# Altium PCB HTY-21024C V01.PcbDoc
Units mm, origin at the board's own origin, x right, y up, seen from the top; angles counter-clockwise.
Board outline 17 x 10 mm, 2 copper layers (Top Layer, Bottom Layer); 4 components, 3 nets, 12 pads, 0 vias.
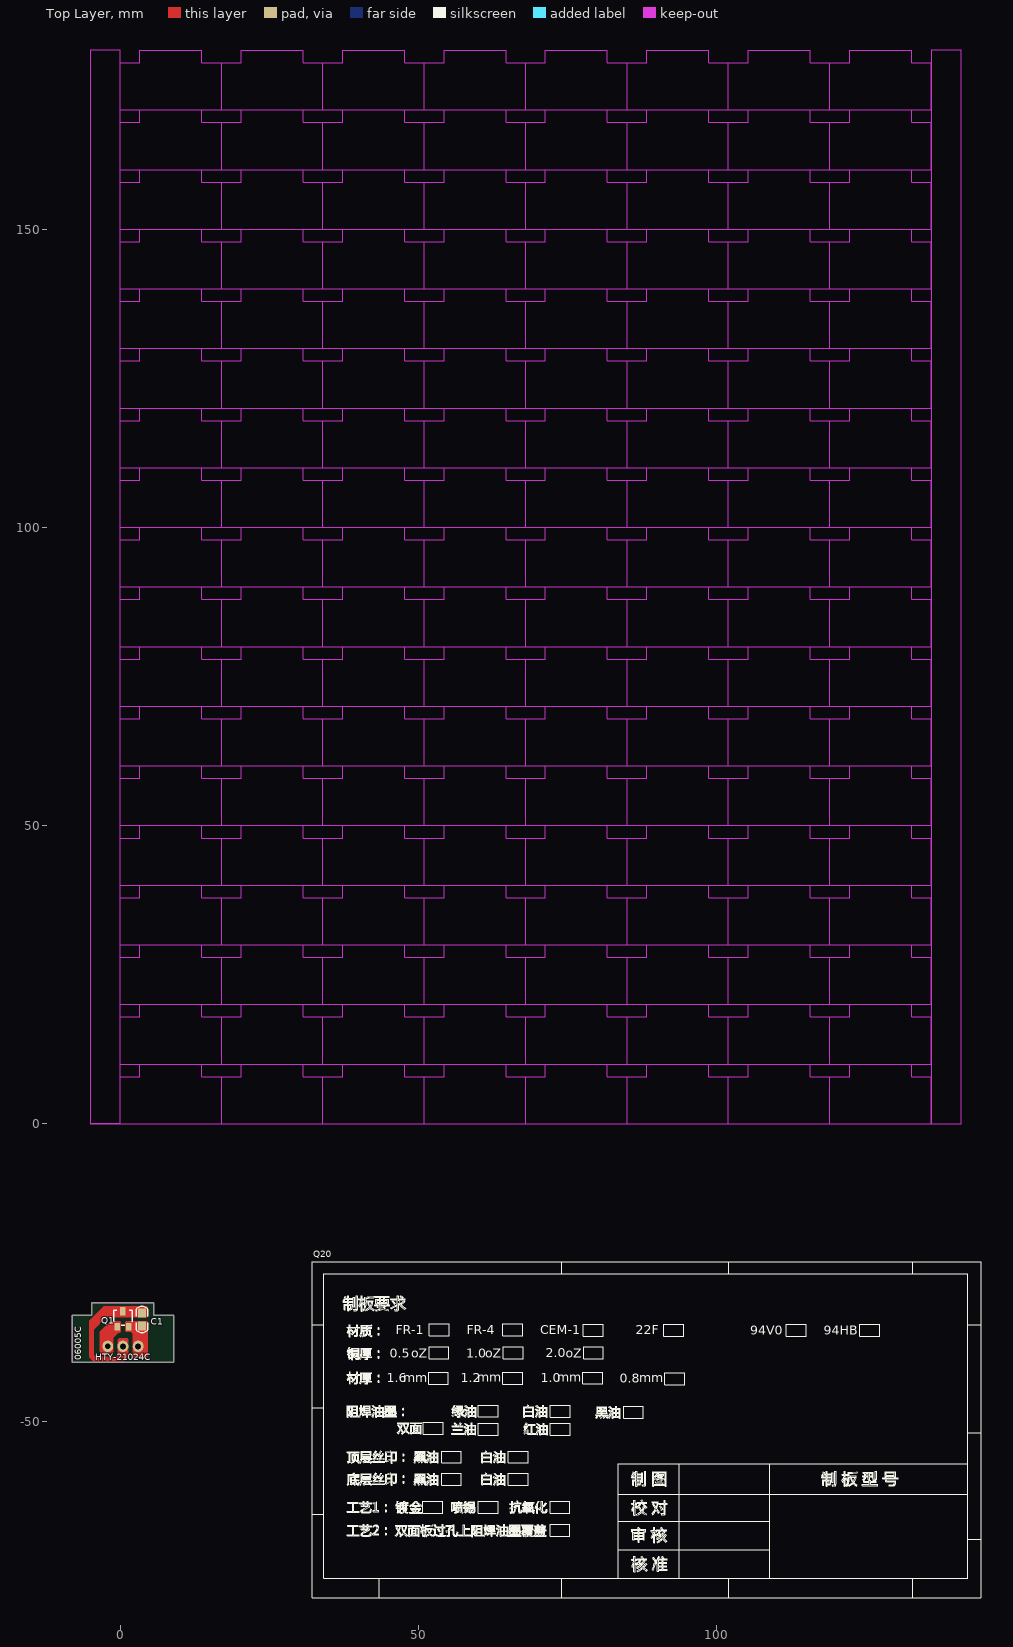
[diagram p0: Top Layer view]
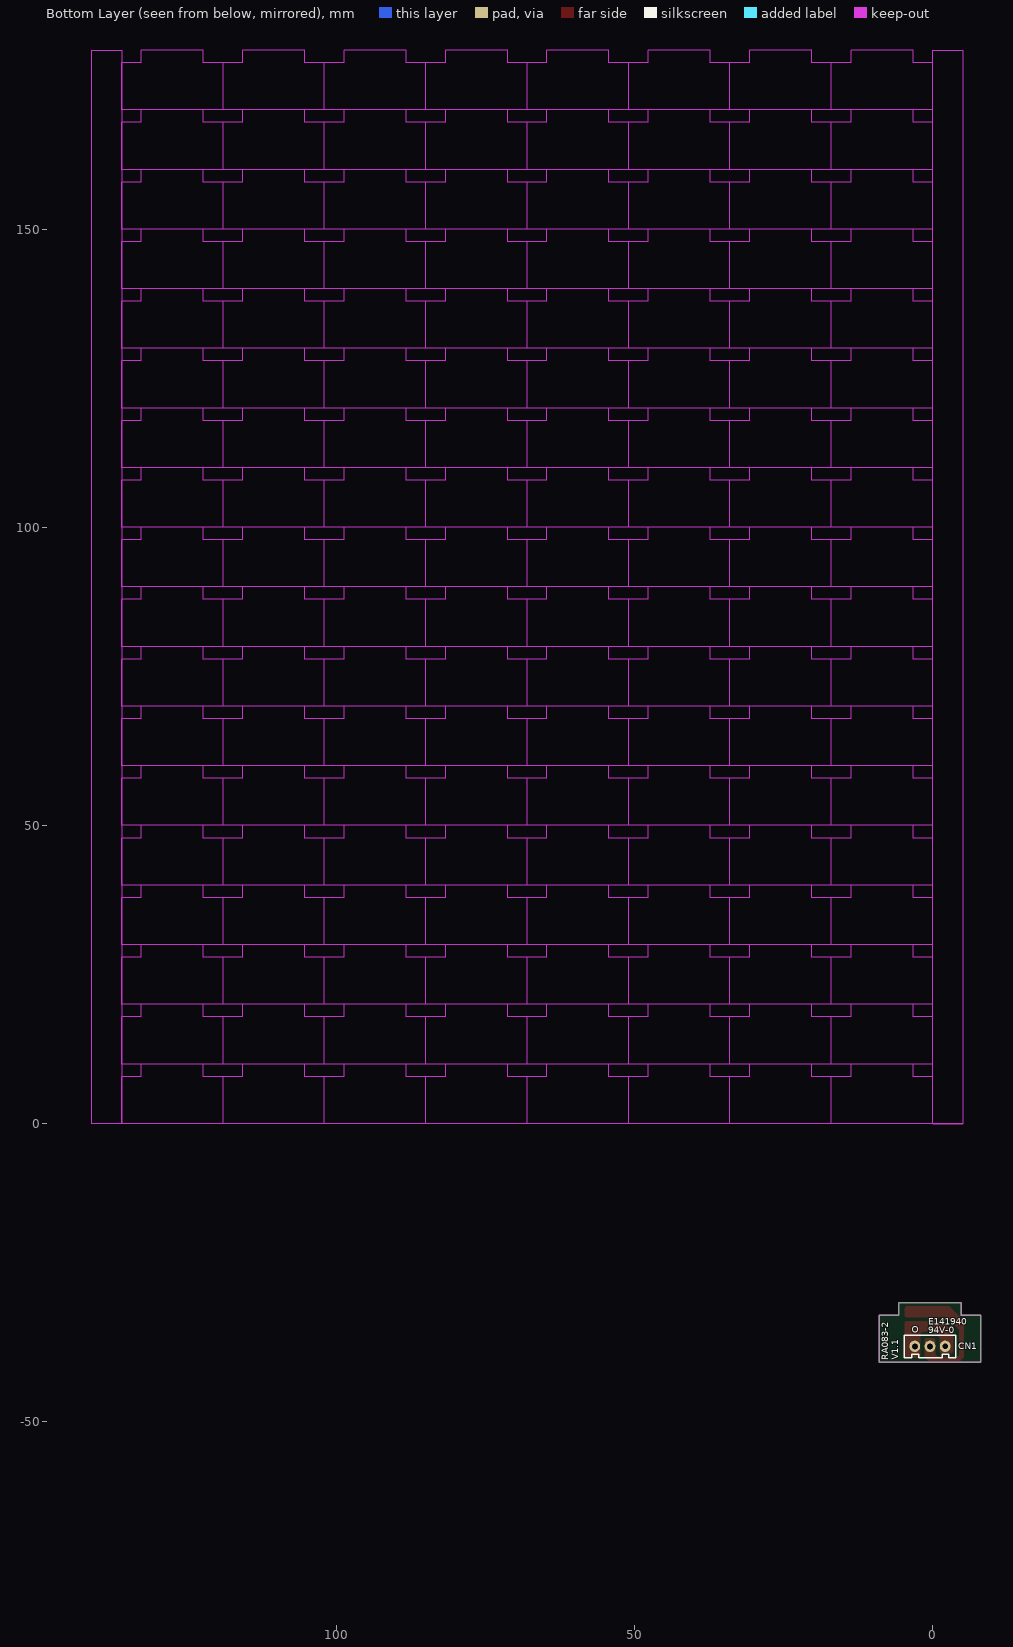
[diagram p1: Bottom Layer view, seen from below]

## Layer stack, top to bottom
Top Solder: solder mask 0.0102, Solder Resist, Dk 3.5
Top Layer: signal copper 0.0356
Dielectric 1: dielectric 0.32, FR-4, Dk 4.8
Bottom Layer: signal copper 0.0356
Bottom Solder: solder mask 0.0102, Solder Resist, Dk 3.5

## Board outline
-8.043,-40.038 -8.043,-32.138 -4.743,-32.138 -4.743,-30.038 5.657,-30.038 5.657,-32.138 8.957,-32.138 8.957,-40.038

## Design rules (kind name [scope] priority, off if disabled: settings)
Clearance [All] p1: gap=0.4
PlaneConnect [All] p1: planeconnectstyle=Direct reliefexpansion=0.508 reliefentries=4 reliefconductorwidth=0.254 reliefairgap=0.254
PolygonConnect [All] p1: connectstyle=Direct reliefconductorwidth=0.254 reliefentries=4 polygonreliefangle="90 Angle" airgapwidth=0.254
RoutingVias [All] p1: holewidth=0.711 width=1.27 viastyle="Through Hole" minholewidth=0.711 minwidth=1.27 maxholewidth=0.711 maxwidth=1.27
SolderMaskExpansion [All] p1: expansion=0.102
Width [All] p1: maxlimit=0.254 minlimit=0.254 preferedwidth=0.254
29 further rules are at their usual default settings.

## Components (designator, comment, footprint, x,y, rotation, side; value= is the part's Value field where it differs from the comment)
C1 "" 0805-C 3.657,-32.838 r270 top
CN1 "" H-XH-3 0.457,-37.338 r180 bottom
Q1 "" SOT-23-IMP8 0.457,-31.547 r0 top
Q20 "" Logo 52.358,-64.143 r0 top

## Footprints (in the part's own frame and the unit in brackets; to place one, negate y for a bottom-side part, rotate by r counter-clockwise, add the part's x,y. Pads: shape width x height; smd on the part's side, far side on the other; paste and mask are expansions set on the pad)
0805-C [mm]
  rect 1.5x1.27 smd mask+0.05: 1(-1.1,0) 2(1.1,0)
  silkscreen extent -2.2,-1 2.2,1
H-XH-3 [mm]
  oval 1.8x1.9 hole 1 mask+0: 1(-2.54,0) 2(0,0)
  oval 1.8x1.9 hole 0.889 mask+0: 3(2.54,0)
  silkscreen extent -4.3,-1.9 4.3,1.9
Logo [mm]
  round 0.069 on Top Overlay: 1(-1.614,-1.16) 1(-1.614,-1.16) 1(-1.614,0.802) 1(-1.614,0.802)
  silkscreen extent -20.13,-15.36 91.93,40.98
SOT-23-IMP8 [mm] "IMP809   and   AMP810"
  rect 0.914x1.38 smd mask+0.05: G(0,0.1)
  rect 0.914x1.3 smd mask+0.05: OUT(0.95,-2.5) VC(-0.95,-2.5)
  silkscreen extent -1.55,-2.26 1.55,0.3

## Nets (pads, with @x,y where several pads share a name; then routed paths per layer and width w, separated by ;. In a path a pad name is that pad's centre, name@x,y a point inside that pad or via, vN(x,y) a via of type N, cw(c..) or ccw(c..) an arc to the next point about the centre after c; other vN are vias at no path point)
GND: C1.1 CN1.2 Q1.G | length 21.4
  Top Layer w0.254: CN1.2 0.457,-38.738 0.084,-39.111 0.073,-39.111 -0.254,-39.438 -4.143,-39.438 -4.674,-38.907 -4.674,-34.269 -1.843,-31.438 3.157,-31.438 C1.1@3.657,-31.938
OUT: C1.2 CN1.1 Q1.OUT | length 4.8
  Top Layer w0.254: Q1.OUT@1.407,-34.038 ccw(c1.649,-33.797) 1.649,-34.138 2.957,-34.138 cw(c2.861,-34.235) 2.997,-34.235 CN1.1
VCC: CN1.3 Q1.VC | length 4.5
  Top Layer w0.254: CN1.3 -2.083,-34.778 -1.343,-34.038 Q1.VC@-0.493,-34.038
pads on no net: Q20.1

## Keep-outs
Keep-Out Layer:
  region: 141,0 141,180 136,180 136,0
  region: 0,0 0,180 -5,180 -5,0
  region: 0,0 0,0 -5,0 -5,0
  lines w0.127: 17,0 34,0 ; 17,0 17,7.9 ; 17,0 0,0 0,7.9 3.3,7.9 3.3,10 13.7,10 13.7,7.9 17,7.9 ; 17,0 17,7.9 ; 17,7.9 20.3,7.9 20.3,10 30.7,10 30.7,7.9 34,7.9 ; 17,10 17,17.9 ; 17,10 0,10 0,17.9 3.3,17.9 3.3,20 13.7,20 13.7,17.9 17,17.9 ; 17,10 17,17.9 ; 17,10 34,10 ; 17,17.9 20.3,17.9 20.3,20 30.7,20 30.7,17.9 34,17.9 ; 17,20 17,27.9 ; 17,20 0,20 0,27.9 3.3,27.9 3.3,30 13.7,30 13.7,27.9 17,27.9 ; 17,20 17,27.9 ; 17,20 34,20 ; 17,27.9 20.3,27.9 20.3,30 30.7,30 30.7,27.9 34,27.9 ; 17,30 34,30 ; 17,30 17,37.9 ; 17,30 0,30 0,37.9 3.3,37.9 3.3,40 13.7,40 13.7,37.9 17,37.9 ; 17,30 17,37.9 ; 17,37.9 20.3,37.9 20.3,40 30.7,40 30.7,37.9 34,37.9 ; 17,40 17,47.9 ; 17,40 0,40 0,47.9 3.3,47.9 3.3,50 13.7,50 13.7,47.9 17,47.9 ; 17,40 17,47.9 ; 17,40 34,40 ; 17,47.9 20.3,47.9 20.3,50 30.7,50 30.7,47.9 34,47.9 ; 17,50 34,50 ; 17,50 17,57.9 ; 17,50 0,50 0,57.9 3.3,57.9 3.3,60 13.7,60 13.7,57.9 17,57.9 ; 17,50 17,57.9 ; 17,57.9 20.3,57.9 20.3,60 30.7,60 30.7,57.9 34,57.9 ; 17,60 17,67.9 ; 17,60 0,60 0,67.9 3.3,67.9 3.3,70 13.7,70 13.7,67.9 17,67.9 ; 17,60 17,67.9 ; 17,60 34,60 ; 17,67.9 20.3,67.9 20.3,70 30.7,70 30.7,67.9 34,67.9 ; 17,70 34,70 ; 17,70 17,77.9 ; 17,70 0,70 0,77.9 3.3,77.9 3.3,80 13.7,80 13.7,77.9 17,77.9 ; 17,70 17,77.9 ; 17,77.9 20.3,77.9 20.3,80 30.7,80 30.7,77.9 34,77.9 ; 17,80 34,80 ; 17,80 17,87.9 ; 17,80 0,80 0,87.9 3.3,87.9 3.3,90 13.7,90 13.7,87.9 17,87.9 ; 17,80 17,87.9 ; 17,87.9 20.3,87.9 20.3,90 30.7,90 30.7,87.9 34,87.9 ; 17,90 17,97.9 ; 17,90 0,90 0,97.9 3.3,97.9 3.3,100 13.7,100 13.7,97.9 17,97.9 ; 17,90 17,97.9 ; 17,90 34,90 ; 17,97.9 20.3,97.9 20.3,100 30.7,100 30.7,97.9 34,97.9 ; 17,100 34,100 ; 17,100 17,107.9 ; 17,100 0,100 0,107.9 3.3,107.9 3.3,110 13.7,110 13.7,107.9 17,107.9 ; 17,100 17,107.9 ; 17,107.9 20.3,107.9 20.3,110 30.7,110 30.7,107.9 34,107.9 ; 17,110 17,117.9 ; 17,110 0,110 0,117.9 3.3,117.9 3.3,120 13.7,120 13.7,117.9 17,117.9 ; 17,110 17,117.9 ; 17,110 34,110 ; 17,117.9 20.3,117.9 20.3,120 30.7,120 30.7,117.9 34,117.9 ; 17,120 17,127.9 ; 17,120 0,120 0,127.9 3.3,127.9 3.3,130 13.7,130 13.7,127.9 17,127.9 ; 17,120 17,127.9 ; 17,120 34,120 ; 17,127.9 20.3,127.9 20.3,130 30.7,130 30.7,127.9 34,127.9 ; 17,130 34,130 ; 17,130 17,137.9 ; 17,130 0,130 0,137.9 3.3,137.9 3.3,140 13.7,140 13.7,137.9 17,137.9 ; 17,130 17,137.9 ; 17,137.9 20.3,137.9 20.3,140 30.7,140 30.7,137.9 34,137.9 ; 17,140 34,140 ; 17,140 17,147.9 ; 17,140 0,140 0,147.9 3.3,147.9 3.3,150 13.7,150 13.7,147.9 17,147.9 ; 17,140 17,147.9 ; 17,147.9 20.3,147.9 20.3,150 30.7,150 30.7,147.9 34,147.9 ; 17,150 17,157.9 ; 17,150 0,150 0,157.9 3.3,157.9 3.3,160 13.7,160 13.7,157.9 17,157.9 ; 17,150 17,157.9 ; 17,150 34,150 ; 17,157.9 20.3,157.9 20.3,160 30.7,160 30.7,157.9 34,157.9 ; 17,160 34,160 ; 17,160 17,167.9 ; 17,160 0,160 0,167.9 3.3,167.9 3.3,170 13.7,170 13.7,167.9 17,167.9 ; 17,160 17,167.9 ; 17,167.9 20.3,167.9 20.3,170 30.7,170 30.7,167.9 34,167.9 ; 17,170 17,177.9 ; 17,170 0,170 0,177.9 3.3,177.9 3.3,180 13.7,180 13.7,177.9 17,177.9 ; 17,170 17,177.9 ; 17,170 34,170 ; 17,177.9 20.3,177.9 20.3,180 30.7,180 30.7,177.9 34,177.9 ; 34,0 51,0 ; 34,0 34,7.9 ; 34,0 34,7.9 ; 34,7.9 37.3,7.9 37.3,10 47.7,10 47.7,7.9 51,7.9 ; 34,10 34,17.9 ; 34,10 34,17.9 ; 34,10 51,10 ; 34,17.9 37.3,17.9 37.3,20 47.7,20 47.7,17.9 51,17.9 ; 34,20 34,27.9 ; 34,20 34,27.9 ; 34,20 51,20 ; 34,27.9 37.3,27.9 37.3,30 47.7,30 47.7,27.9 51,27.9 ; 34,30 51,30 ; 34,30 34,37.9 ; 34,30 34,37.9 ; 34,37.9 37.3,37.9 37.3,40 47.7,40 47.7,37.9 51,37.9 ; 34,40 34,47.9 ; 34,40 34,47.9 ; 34,40 51,40 ; 34,47.9 37.3,47.9 37.3,50 47.7,50 47.7,47.9 51,47.9 ; 34,50 51,50 ; 34,50 34,57.9 ; 34,50 34,57.9 ; 34,57.9 37.3,57.9 37.3,60 47.7,60 47.7,57.9 51,57.9 ; 34,60 34,67.9 ; 34,60 34,67.9 ; 34,60 51,60 ; 34,67.9 37.3,67.9 37.3,70 47.7,70 47.7,67.9 51,67.9 ; 34,70 51,70 ; 34,70 34,77.9 ; 34,70 34,77.9 ; 34,77.9 37.3,77.9 37.3,80 47.7,80 47.7,77.9 51,77.9 ; 34,80 51,80 ; 34,80 34,87.9 ; 34,80 34,87.9 ; 34,87.9 37.3,87.9 37.3,90 47.7,90 47.7,87.9 51,87.9 ; 34,90 34,97.9 ; 34,90 34,97.9 ; 34,90 51,90 ; 34,97.9 37.3,97.9 37.3,100 47.7,100 47.7,97.9 51,97.9 ; 34,100 51,100 ; 34,100 34,107.9 ; 34,100 34,107.9 ; 34,107.9 37.3,107.9 37.3,110 47.7,110 47.7,107.9 51,107.9 ; 34,110 34,117.9 ; 34,110 34,117.9 ; 34,110 51,110 ; 34,117.9 37.3,117.9 37.3,120 47.7,120 47.7,117.9 51,117.9 ; 34,120 34,127.9 ; 34,120 34,127.9 ; 34,120 51,120 ; 34,127.9 37.3,127.9 37.3,130 47.7,130 47.7,127.9 51,127.9 ; 34,130 51,130 ; 34,130 34,137.9 ; 34,130 34,137.9 ; 34,137.9 37.3,137.9 37.3,140 47.7,140 47.7,137.9 51,137.9 ; 34,140 51,140 ; 34,140 34,147.9 ; 34,140 34,147.9 ; 34,147.9 37.3,147.9 37.3,150 47.7,150 47.7,147.9 51,147.9 ; 34,150 34,157.9 ; 34,150 34,157.9 ; 34,150 51,150 ; 34,157.9 37.3,157.9 37.3,160 47.7,160 47.7,157.9 51,157.9 ; 34,160 51,160 ; 34,160 34,167.9 ; 34,160 34,167.9 ; 34,167.9 37.3,167.9 37.3,170 47.7,170 47.7,167.9 51,167.9 ; 34,170 34,177.9 ; 34,170 34,177.9 ; 34,170 51,170 ; 34,177.9 37.3,177.9 37.3,180 47.7,180 47.7,177.9 51,177.9 ; 51,0 68,0 ; 51,0 51,7.9 ; 51,0 51,7.9 ; 51,7.9 54.3,7.9 54.3,10 64.7,10 64.7,7.9 68,7.9 ; 51,10 51,17.9 ; 51,10 51,17.9 ; 51,10 68,10 ; 51,17.9 54.3,17.9 54.3,20 64.7,20 64.7,17.9 68,17.9 ; 51,20 51,27.9 ; 51,20 51,27.9 ; 51,20 68,20 ; 51,27.9 54.3,27.9 54.3,30 64.7,30 64.7,27.9 68,27.9 ; 51,30 68,30 ; 51,30 51,37.9 ; 51,30 51,37.9 ; 51,37.9 54.3,37.9 54.3,40 64.7,40 64.7,37.9 68,37.9 ; 51,40 51,47.9 ; 51,40 51,47.9 ; 51,40 68,40 ; 51,47.9 54.3,47.9 54.3,50 64.7,50 64.7,47.9 68,47.9 ; 51,50 68,50 ; 51,50 51,57.9 ; 51,50 51,57.9 ; 51,57.9 54.3,57.9 54.3,60 64.7,60 64.7,57.9 68,57.9 ; 51,60 51,67.9 ; 51,60 51,67.9 ; 51,60 68,60 ; 51,67.9 54.3,67.9 54.3,70 64.7,70 64.7,67.9 68,67.9 ; 51,70 68,70 ; 51,70 51,77.9 ; 51,70 51,77.9 ; 51,77.9 54.3,77.9 54.3,80 64.7,80 64.7,77.9 68,77.9 ; 51,80 68,80 ; 51,80 51,87.9 ; 51,80 51,87.9 ; 51,87.9 54.3,87.9 54.3,90 64.7,90 64.7,87.9 68,87.9 ; 51,90 51,97.9 ; 51,90 51,97.9 ; 51,90 68,90 ; 51,97.9 54.3,97.9 54.3,100 64.7,100 64.7,97.9 68,97.9 ; 51,100 68,100 ; 51,100 51,107.9 ; 51,100 51,107.9 ; 51,107.9 54.3,107.9 54.3,110 64.7,110 64.7,107.9 68,107.9 ; 51,110 51,117.9 ; 51,110 51,117.9 ; 51,110 68,110 ; 51,117.9 54.3,117.9 54.3,120 64.7,120 64.7,117.9 68,117.9 ; 51,120 51,127.9 ; 51,120 51,127.9 ; 51,120 68,120 ; 51,127.9 54.3,127.9 54.3,130 64.7,130 64.7,127.9 68,127.9 ; 51,130 68,130 ; 51,130 51,137.9 ; 51,130 51,137.9 ; 51,137.9 54.3,137.9 54.3,140 64.7,140 64.7,137.9 68,137.9 ; 51,140 68,140 ; 51,140 51,147.9 ; 51,140 51,147.9 ; 51,147.9 54.3,147.9 54.3,150 64.7,150 64.7,147.9 68,147.9 ; 51,150 51,157.9 ; 51,150 51,157.9 ; 51,150 68,150 ; 51,157.9 54.3,157.9 54.3,160 64.7,160 64.7,157.9 68,157.9 ; 51,160 68,160 ; 51,160 51,167.9 ; 51,160 51,167.9 ; 51,167.9 54.3,167.9 54.3,170 64.7,170 64.7,167.9 68,167.9 ; 51,170 51,177.9 ; 51,170 51,177.9 ; 51,170 68,170 ; 51,177.9 54.3,177.9 54.3,180 64.7,180 64.7,177.9 68,177.9 ; 68,0 68,7.9 ; 68,0 85,0 ; 68,0 68,7.9 ; 68,7.9 71.3,7.9 71.3,10 81.7,10 81.7,7.9 85,7.9 ; 68,10 68,17.9 ; 68,10 85,10 ; 68,10 68,17.9 ; 68,17.9 71.3,17.9 71.3,20 81.7,20 81.7,17.9 85,17.9 ; 68,20 68,27.9 ; 68,20 85,20 ; 68,20 68,27.9 ; 68,27.9 71.3,27.9 71.3,30 81.7,30 81.7,27.9 85,27.9 ; 68,30 68,37.9 ; 68,30 85,30 ; 68,30 68,37.9 ; 68,37.9 71.3,37.9 71.3,40 81.7,40 81.7,37.9 85,37.9 ; 68,40 68,47.9 ; 68,40 85,40 ; 68,40 68,47.9 ; 68,47.9 71.3,47.9 71.3,50 81.7,50 81.7,47.9 85,47.9 ; 68,50 68,57.9 ; 68,50 85,50 ; 68,50 68,57.9 ; 68,57.9 71.3,57.9 71.3,60 81.7,60 81.7,57.9 85,57.9 ; 68,60 68,67.9 ; 68,60 85,60 ; 68,60 68,67.9 ; 68,67.9 71.3,67.9 71.3,70 81.7,70 81.7,67.9 85,67.9 ; 68,70 68,77.9 ; 68,70 85,70 ; 68,70 68,77.9 ; 68,77.9 71.3,77.9 71.3,80 81.7,80 81.7,77.9 85,77.9 ; 68,80 68,87.9 ; 68,80 85,80 ; 68,80 68,87.9 ; 68,87.9 71.3,87.9 71.3,90 81.7,90 81.7,87.9 85,87.9 ; 68,90 68,97.9 ; 68,90 85,90 ; 68,90 68,97.9 ; 68,97.9 71.3,97.9 71.3,100 81.7,100 81.7,97.9 85,97.9 ; 68,100 68,107.9 ; 68,100 85,100 ; 68,100 68,107.9 ; 68,107.9 71.3,107.9 71.3,110 81.7,110 81.7,107.9 85,107.9 ; 68,110 68,117.9 ; 68,110 85,110 ; 68,110 68,117.9 ; 68,117.9 71.3,117.9 71.3,120 81.7,120 81.7,117.9 85,117.9 ; 68,120 68,127.9 ; 68,120 85,120 ; 68,120 68,127.9 ; 68,127.9 71.3,127.9 71.3,130 81.7,130 81.7,127.9 85,127.9 ; 68,130 68,137.9 ; 68,130 85,130 ; 68,130 68,137.9 ; 68,137.9 71.3,137.9 71.3,140 81.7,140 81.7,137.9 85,137.9 ; 68,140 68,147.9 ; 68,140 85,140 ; 68,140 68,147.9 ; 68,147.9 71.3,147.9 71.3,150 81.7,150 81.7,147.9 85,147.9 ; 68,150 68,157.9 ; 68,150 85,150 ; 68,150 68,157.9 ; 68,157.9 71.3,157.9 71.3,160 81.7,160 81.7,157.9 85,157.9 ; 68,160 68,167.9 ; 68,160 85,160 ; 68,160 68,167.9 ; 68,167.9 71.3,167.9 71.3,170 81.7,170 81.7,167.9 85,167.9 ; 68,170 68,177.9 ; 68,170 85,170 ; 68,170 68,177.9 ; 68,177.9 71.3,177.9 71.3,180 81.7,180 81.7,177.9 85,177.9 ; 85,0 85,7.9 ; 85,0 85,7.9 ; 85,0 102,0 ; 85,7.9 88.3,7.9 88.3,10 98.7,10 98.7,7.9 102,7.9 ; 85,10 85,17.9 ; 85,10 85,17.9 ; 85,10 102,10 ; 85,17.9 88.3,17.9 88.3,20 98.7,20 98.7,17.9 102,17.9 ; 85,20 102,20 ; 85,20 85,27.9 ; 85,20 85,27.9 ; 85,27.9 88.3,27.9 88.3,30 98.7,30 98.7,27.9 102,27.9 ; 85,30 102,30 ; 85,30 85,37.9 ; 85,30 85,37.9 ; 85,37.9 88.3,37.9 88.3,40 98.7,40 98.7,37.9 102,37.9 ; 85,40 102,40 ; 85,40 85,47.9 ; 85,40 85,47.9 ; 85,47.9 88.3,47.9 88.3,50 98.7,50 98.7,47.9 102,47.9 ; 85,50 102,50 ; 85,50 85,57.9 ; 85,50 85,57.9 ; 85,57.9 88.3,57.9 88.3,60 98.7,60 98.7,57.9 102,57.9 ; 85,60 102,60 ; 85,60 85,67.9 ; 85,60 85,67.9 ; 85,67.9 88.3,67.9 88.3,70 98.7,70 98.7,67.9 102,67.9 ; 85,70 102,70 ; 85,70 85,77.9 ; 85,70 85,77.9 ; 85,77.9 88.3,77.9 88.3,80 98.7,80 98.7,77.9 102,77.9 ; 85,80 85,87.9 ; 85,80 85,87.9 ; 85,80 102,80 ; 85,87.9 88.3,87.9 88.3,90 98.7,90 98.7,87.9 102,87.9 ; 85,90 85,97.9 ; 85,90 85,97.9 ; 85,90 102,90 ; 85,97.9 88.3,97.9 88.3,100 98.7,100 98.7,97.9 102,97.9 ; 85,100 85,107.9 ; 85,100 85,107.9 ; 85,100 102,100 ; 85,107.9 88.3,107.9 88.3,110 98.7,110 98.7,107.9 102,107.9 ; 85,110 85,117.9 ; 85,110 85,117.9 ; 85,110 102,110 ; 85,117.9 88.3,117.9 88.3,120 98.7,120 98.7,117.9 102,117.9 ; 85,120 102,120 ; 85,120 85,127.9 ; 85,120 85,127.9 ; 85,127.9 88.3,127.9 88.3,130 98.7,130 98.7,127.9 102,127.9 ; 85,130 102,130 ; 85,130 85,137.9 ; 85,130 85,137.9 ; 85,137.9 88.3,137.9 88.3,140 98.7,140 98.7,137.9 102,137.9 ; 85,140 85,147.9 ; 85,140 85,147.9 ; 85,140 102,140 ; 85,147.9 88.3,147.9 88.3,150 98.7,150 98.7,147.9 102,147.9 ; 85,150 85,157.9 ; 85,150 85,157.9 ; 85,150 102,150 ; 85,157.9 88.3,157.9 88.3,160 98.7,160 98.7,157.9 102,157.9 ; 85,160 85,167.9 ; 85,160 85,167.9 ; 85,160 102,160 ; 85,167.9 88.3,167.9 88.3,170 98.7,170 98.7,167.9 102,167.9 ; 85,170 85,177.9 ; 85,170 85,177.9 ; 85,170 102,170 ; 85,177.9 88.3,177.9 88.3,180 98.7,180 98.7,177.9 102,177.9 ; 102,0 102,7.9 ; 102,0 102,7.9 ; 102,0 119,0 ; 102,7.9 105.3,7.9 105.3,10 115.7,10 115.7,7.9 119,7.9 ; 102,10 102,17.9 ; 102,10 102,17.9 ; 102,10 119,10 ; 102,17.9 105.3,17.9 105.3,20 115.7,20 115.7,17.9 119,17.9 ; 102,20 119,20 ; 102,20 102,27.9 ; 102,20 102,27.9 ; 102,27.9 105.3,27.9 105.3,30 115.7,30 115.7,27.9 119,27.9 ; 102,30 119,30 ; 102,30 102,37.9 ; 102,30 102,37.9 ; 102,37.9 105.3,37.9 105.3,40 115.7,40 115.7,37.9 119,37.9 ; 102,40 119,40 ; 102,40 102,47.9 ; 102,40 102,47.9 ; 102,47.9 105.3,47.9 105.3,50 115.7,50 115.7,47.9 119,47.9 ; 102,50 119,50 ; 102,50 102,57.9 ; 102,50 102,57.9 ; 102,57.9 105.3,57.9 105.3,60 115.7,60 115.7,57.9 119,57.9 ; 102,60 119,60 ; 102,60 102,67.9 ; 102,60 102,67.9 ; 102,67.9 105.3,67.9 105.3,70 115.7,70 115.7,67.9 119,67.9 ; 102,70 119,70 ; 102,70 102,77.9 ; 102,70 102,77.9 ; 102,77.9 105.3,77.9 105.3,80 115.7,80 115.7,77.9 119,77.9 ; 102,80 102,87.9 ; 102,80 102,87.9 ; 102,80 119,80 ; 102,87.9 105.3,87.9 105.3,90 115.7,90 115.7,87.9 119,87.9 ; 102,90 102,97.9 ; 102,90 102,97.9 ; 102,90 119,90 ; 102,97.9 105.3,97.9 105.3,100 115.7,100 115.7,97.9 119,97.9 ; 102,100 102,107.9 ; 102,100 102,107.9 ; 102,100 119,100 ; 102,107.9 105.3,107.9 105.3,110 115.7,110 115.7,107.9 119,107.9 ; 102,110 102,117.9 ; 102,110 102,117.9 ; 102,110 119,110 ; 102,117.9 105.3,117.9 105.3,120 115.7,120 115.7,117.9 119,117.9 ; 102,120 119,120 ; 102,120 102,127.9 ; 102,120 102,127.9 ; 102,127.9 105.3,127.9 105.3,130 115.7,130 115.7,127.9 119,127.9 ; 102,130 119,130 ; 102,130 102,137.9 ; 102,130 102,137.9 ; 102,137.9 105.3,137.9 105.3,140 115.7,140 115.7,137.9 119,137.9 ; 102,140 102,147.9 ; 102,140 102,147.9 ; 102,140 119,140 ; 102,147.9 105.3,147.9 105.3,150 115.7,150 115.7,147.9 119,147.9 ; 102,150 102,157.9 ; 102,150 102,157.9 ; 102,150 119,150 ; 102,157.9 105.3,157.9 105.3,160 115.7,160 115.7,157.9 119,157.9 ; 102,160 102,167.9 ; 102,160 102,167.9 ; 102,160 119,160 ; 102,167.9 105.3,167.9 105.3,170 115.7,170 115.7,167.9 119,167.9 ; 102,170 102,177.9 ; 102,170 102,177.9 ; 102,170 119,170 ; 102,177.9 105.3,177.9 105.3,180 115.7,180 115.7,177.9 119,177.9 ; 119,0 119,7.9 ; 119,0 119,7.9 ; 119,0 136,0 136,7.9 132.7,7.9 132.7,10 122.3,10 122.3,7.9 119,7.9 ; 119,10 119,17.9 ; 119,10 119,17.9 ; 119,10 136,10 136,17.9 132.7,17.9 132.7,20 122.3,20 122.3,17.9 119,17.9 ; 119,20 136,20 136,27.9 132.7,27.9 132.7,30 122.3,30 122.3,27.9 119,27.9 ; 119,20 119,27.9 ; 119,20 119,27.9 ; 119,30 136,30 136,37.9 132.7,37.9 132.7,40 122.3,40 122.3,37.9 119,37.9 ; 119,30 119,37.9 ; 119,30 119,37.9 ; 119,40 136,40 136,47.9 132.7,47.9 132.7,50 122.3,50 122.3,47.9 119,47.9 ; 119,40 119,47.9 ; 119,40 119,47.9 ; 119,50 136,50 136,57.9 132.7,57.9 132.7,60 122.3,60 122.3,57.9 119,57.9 ; 119,50 119,57.9 ; 119,50 119,57.9 ; 119,60 136,60 136,67.9 132.7,67.9 132.7,70 122.3,70 122.3,67.9 119,67.9 ; 119,60 119,67.9 ; 119,60 119,67.9 ; 119,70 136,70 136,77.9 132.7,77.9 132.7,80 122.3,80 122.3,77.9 119,77.9 ; 119,70 119,77.9 ; 119,70 119,77.9 ; 119,80 119,87.9 ; 119,80 119,87.9 ; 119,80 136,80 136,87.9 132.7,87.9 132.7,90 122.3,90 122.3,87.9 119,87.9 ; 119,90 119,97.9 ; 119,90 119,97.9 ; 119,90 136,90 136,97.9 132.7,97.9 132.7,100 122.3,100 122.3,97.9 119,97.9 ; 119,100 119,107.9 ; 119,100 119,107.9 ; 119,100 136,100 136,107.9 132.7,107.9 132.7,110 122.3,110 122.3,107.9 119,107.9 ; 119,110 119,117.9 ; 119,110 119,117.9 ; 119,110 136,110 136,117.9 132.7,117.9 132.7,120 122.3,120 122.3,117.9 119,117.9 ; 119,120 136,120 136,127.9 132.7,127.9 132.7,130 122.3,130 122.3,127.9 119,127.9 ; 119,120 119,127.9 ; 119,120 119,127.9 ; 119,130 136,130 136,137.9 132.7,137.9 132.7,140 122.3,140 122.3,137.9 119,137.9 ; 119,130 119,137.9 ; 119,130 119,137.9 ; 119,140 119,147.9 ; 119,140 119,147.9 ; 119,140 136,140 136,147.9 132.7,147.9 132.7,150 122.3,150 122.3,147.9 119,147.9 ; 119,150 119,157.9 ; 119,150 119,157.9 ; 119,150 136,150 136,157.9 132.7,157.9 132.7,160 122.3,160 122.3,157.9 119,157.9 ; 119,160 119,167.9 ; 119,160 119,167.9 ; 119,160 136,160 136,167.9 132.7,167.9 132.7,170 122.3,170 122.3,167.9 119,167.9 ; 119,170 119,177.9 ; 119,170 119,177.9 ; 119,170 136,170 136,177.9 132.7,177.9 132.7,180 122.3,180 122.3,177.9 119,177.9 ; -8.043,-40.038 -8.043,-32.138 -4.743,-32.138 -4.743,-30.038 5.657,-30.038 5.657,-32.138 8.957,-32.138 8.957,-40.038 -8.043,-40.038

## Other copper
Top Layer:
  region net VCC: 0.076,-33.249 -0.051,-33.122 -1.626,-33.122 -3.429,-34.925 -3.429,-38.202 -3.15,-38.481 -1.295,-38.481 -1.168,-38.354 -1.168,-35.865 -0.356,-35.052 -0.076,-35.052 0.076,-34.9
  region net OUT: 4.648,-33.274 4.496,-33.122 0.991,-33.122 0.813,-33.299 0.813,-34.747 0.965,-34.9 1.753,-34.9 2.083,-35.23 2.083,-39.014 2.286,-39.218 4.42,-39.218 4.648,-38.989
  region net GND: 4.657,-31.638 4.657,-30.838 4.457,-30.638 -2.743,-30.638 -5.182,-33.077 -5.182,-39.192 -4.536,-39.838 0.657,-39.838 1.357,-39.138 1.357,-36.13 1.168,-35.941 -0.178,-35.941 -0.432,-36.195 -0.432,-38.659 -0.864,-39.091 -4.115,-39.091 -4.42,-38.786 -4.42,-34.519 -2.388,-32.487 4.47,-32.487 4.657,-32.3

## Silkscreen, mask and mechanical layers (free items; w line width, h text height)
Top Overlay:
  text "HTY-21024C" at -4.216,-39.649 h1.1
  text "06005C" at -6.528,-39.7 h1.1 r90
Bottom Overlay:
  text "E141940" at 0.711,-33.68 h1.1
  text "O" at 3.531,-35.077 h1.1
  text "94V-0" at 0.737,-35.128 h1.1
  text "V1.1" at 5.791,-39.599 h1.1 r270
  text "RA083-2" at 7.417,-39.7 h1.1 r270
Top Solder:
  region: 55.203,-35.542 55.203,-33.231 51.749,-33.231 51.749,-35.542
  region: 55.051,-43.594 55.051,-41.791 51.596,-41.791 51.596,-43.594
  region: 63.179,-49.182 63.179,-47.125 59.902,-47.125 59.902,-49.182
  region: 68.386,-60.536 68.386,-58.58 65.109,-58.58 65.109,-60.536
  region: 75.523,-65.438 75.523,-63.254 71.891,-63.254 71.891,-65.438
  region: 67.802,-39.505 67.802,-37.244 64.271,-37.244 64.271,-39.505
  text "HTY-21024C V01" at 114,-71 h2

## Dimensions
-5,0 to -5,180 on Keep-Out Layer
-5,0 to 141,0 on Keep-Out Layer
0,0 to 136,0 on Keep-Out Layer
-8.043,-40.038 to -4.743,-30.038 on Keep-Out Layer
-8.043,-40.038 to 8.957,-40.038 on Keep-Out Layer

## Text inside footprints (layer, text, board x,y; h text height)
Q20: Top Overlay "2.0" at 71.324,-39.2 h1.52; Top Overlay "0.8" at 83.795,-43.467 h1.52; Top Overlay "1.0" at 70.486,-43.367 h1.52; Top Overlay "1.2" at 57.083,-43.367 h1.52; Top Overlay "1.0" at 58.023,-39.278 h1.52; Top Overlay "0.5" at 45.196,-39.225 h1.52; Top Overlay "1.6" at 44.662,-43.367 h1.52; Top Overlay "oZ" at 74.711,-39.225 h1.52; Top Overlay "oZ" at 61.235,-39.225 h1.52; Top Overlay "mm" at 86.996,-43.391 h1.5; Top Overlay "mm" at 73.305,-43.289 h1.5; Top Overlay "mm" at 59.902,-43.289 h1.5; Top Overlay "mm" at 47.482,-43.34 h1.5; Top Overlay "oZ" at 48.802,-39.225 h1.52; Top Overlay "FR-1" at 46.237,-35.314 h1.52; Top Overlay "FR-4" at 58.124,-35.339 h1.52; Top Overlay "CEM-1" at 70.46,-35.339 h1.52; Top Overlay "22F" at 86.46,-35.339 h1.52; Top Overlay "94V0" at 105.624,-35.41 h1.52; Top Overlay "94HB" at 117.975,-35.41 h1.52